# Altium PCB PCB2.PcbDoc
Units mil, origin at the board's own origin, x right, y up, seen from the top; angles counter-clockwise.
Board outline 9260 x 3485 mil, 2 copper layers (Top Layer, Bottom Layer); 17 components, 11 nets, 40 pads, 12 vias.
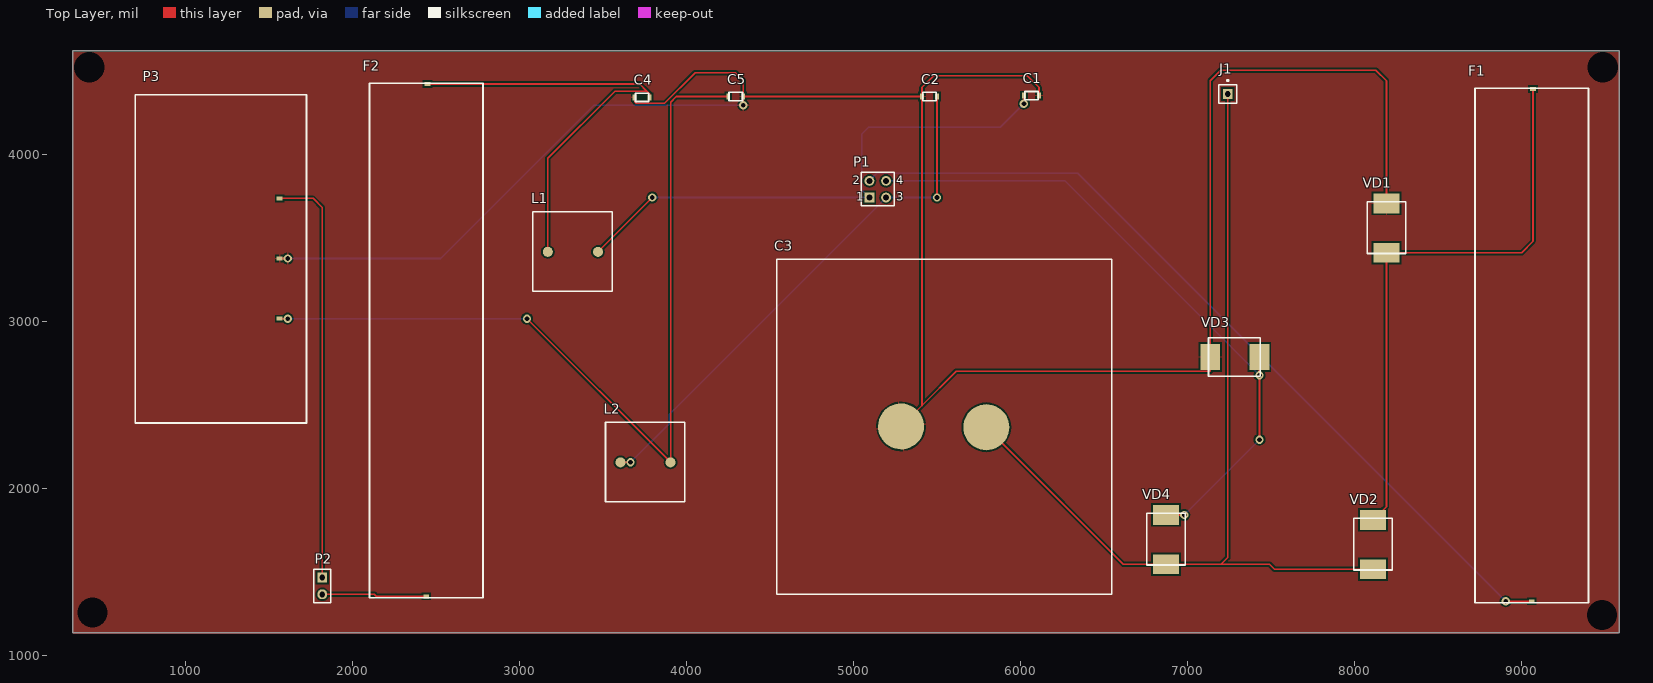
[diagram p0: Top Layer view]
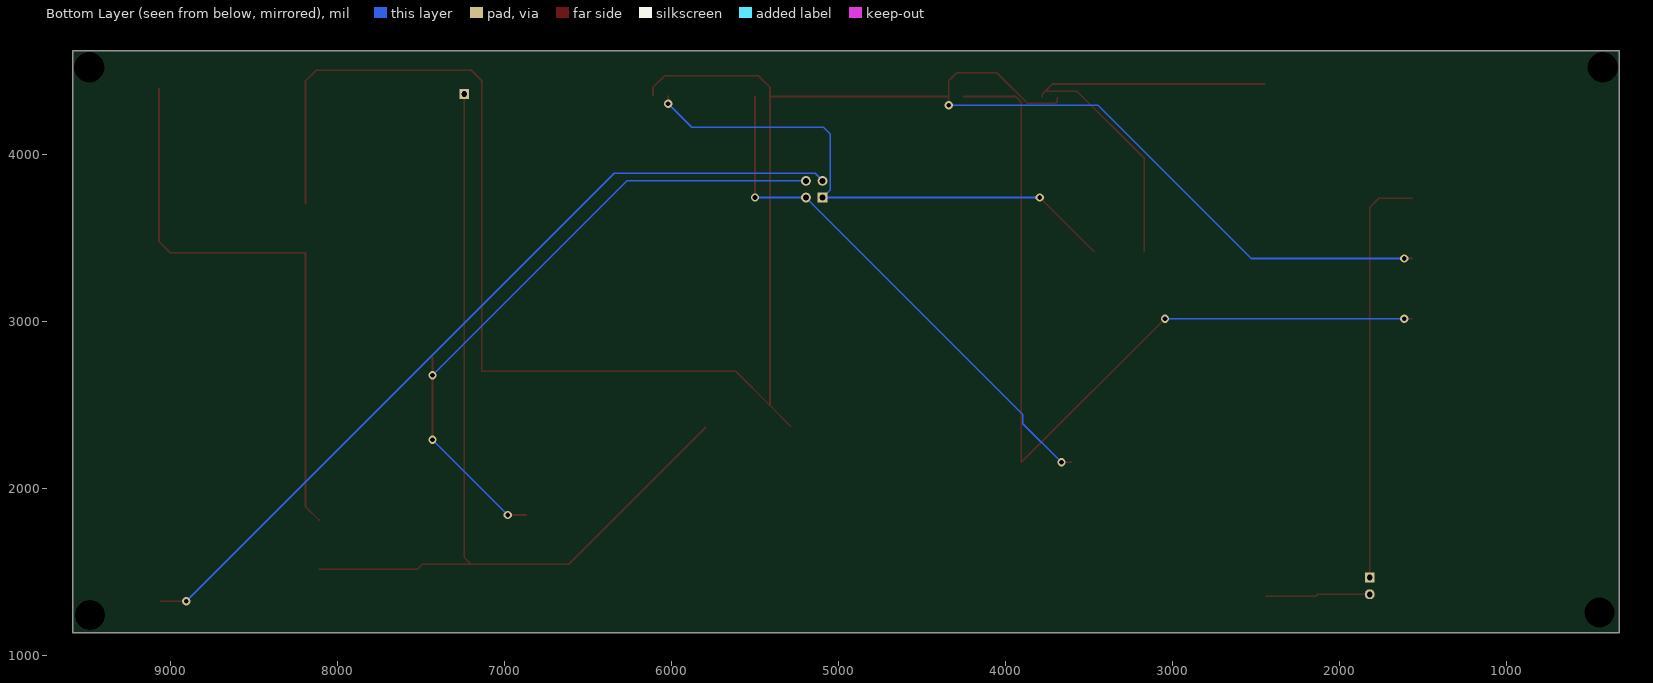
[diagram p1: Bottom Layer view, seen from below]
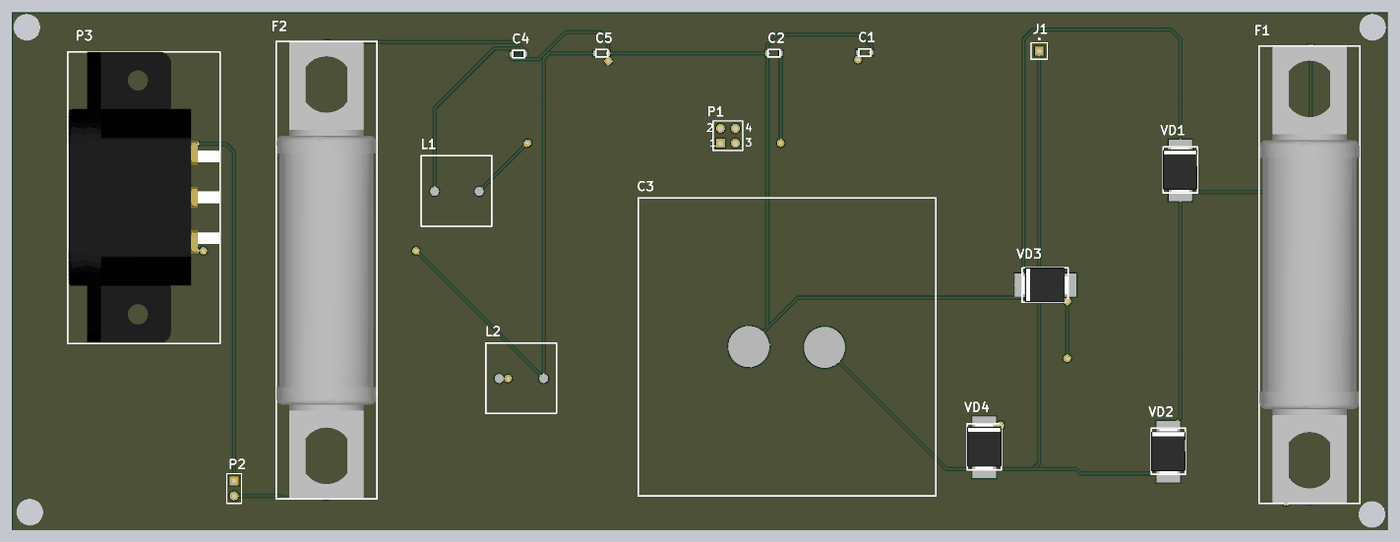
[diagram p2: 3D render of the assembled board from above, using the file's embedded part models]

## Layer stack, top to bottom
Top Solder: solder mask 0.4, Solder Resist, Dk 3.5
Top Layer: signal copper 1.4
Dielectric 1: dielectric 12.6, FR-4, Dk 4.8
Bottom Layer: signal copper 1.4
Bottom Solder: solder mask 0.4, Solder Resist, Dk 3.5

## Board outline
325,1135 9585,1135 9585,4620 325,4620

## Design rules (kind name [scope] priority, off if disabled: settings)
Clearance [All] p1: gap=10 ignorepadtopadclearanceinfootprint=FALSE except(0: Arc-Hole Track-Hole SMDPad-Hole THPad-Hole Via-Hole Fill-Hole Poly-Hole Region-Hole Text-Hole)
PolygonConnect [All] p1: connectstyle=Relief reliefconductorwidth=10 reliefentries=4 polygonreliefangle="90 Angle" airgapwidth=10
RoomDefinition Э3 [InComponentClass('Э3')] p1: confinementstyle=ConfineIn formatcopy=TRUE lockcomponents=FALSE outline 415,1270 9430,1270 9430,4560 415,4560
RoutingVias [All] p1: holewidth=28 width=50 viastyle="Through Hole" minholewidth=28 minwidth=50 maxholewidth=28 maxwidth=50
SolderMaskExpansion [All] p1: expansion=4
Width [All] p1: maxlimit=10 minlimit=10 preferedwidth=10
30 further rules are at their usual default settings.

## Components (designator, comment, footprint, x,y, rotation, side; value= is the part's Value field where it differs from the comment)
C1 "0.1 мкФ" Condensator 6065,4350 r0 top
C2 "0.1 мкФ" Condensator 5455,4345 r0 top
C3 "220000 мкФ" condpolar 5600,2410 r0 top
C4 "0.1 мкФ" Condensator 3735,4340 r0 top
C5 "0.1 мкФ" Condensator 4295,4345 r0 top
F1 "FUSE" "FUSE 80" 9060,2855 r0 top
F2 "FUSE" "FUSE 80" 2442.13,2884.57 r0 top
J1 "Socket" PIN1 7240,4360 r0 top
L1 "inductor" inductor 3315,3420 r0 top
L2 "inductor" inductor 3750,2160 r0 top
P1 "Header 2X2" HDR2X2 5095,3740 r0 top
P2 "Header 2" HDR1X2 1820,1465 r270 top
P3 "Plug AC Male" AC 1060,3280 r90 top
VD1 "Diod" DIOD 8195,3565 r0 top
VD2 "Diod" DIOD 8115,1670 r0 top
VD3 "Diod" DIOD 7275,2790 r90 top
VD4 "Diod" DIOD 6875,1700 r0 top

## Footprints (in the part's own frame and the unit in brackets; to place one, negate y for a bottom-side part, rotate by r counter-clockwise, add the part's x,y. Pads: shape width x height; smd on the part's side, far side on the other; paste and mask are expansions set on the pad)
AC [mil]
  rect 23.62x35.43 smd: 1(455,-505) 2(-265,-505) 3(95,-505)
  silkscreen extent -890,-665 1075,360, body extent -885,-660 1075,356, height 1235
Condensator [mm]
  rect 0.6x0.9 smd: 1(-1.143,0) 2(1.143,0)
  silkscreen extent -1.02,-0.64 1.02,0.64, body extent -0.98,-0.65 1.02,0.65, height 1.27
condpolar [mil]
  round 275.59 smd: 1(-315,-40) 2(195,-45)
  silkscreen extent -1060,-1045 945,960, body extent -1064,-1047 944,957, height 4016
DIOD [mil]
  rect 157.48x118.11 smd: 1(-5,140) 2(-5,-155)
  silkscreen extent -120,-160 110,150, body extent -121,-160 111,153, height 110
"FUSE 80" [mm]
  rect 0.9x0.6 smd: 1(0,-38.9) 2(0.2,39)
  silkscreen extent -8.64,-39.12 8.64,39.12, body extent -8.55,-39 8.55,39, height 18.55
HDR1X2 [mm] "Connector; Header; 2 Position"
  rect 1.5x1.5 hole 0.9: 1(0,0)
  round 1.5 hole 0.9: 2(2.54,0)
  silkscreen extent -1.27,-1.27 3.81,1.27
HDR2X2 [mm] "Connector; Header; 2x2 Position"
  rect 1.5x1.5 hole 0.9: 1(0,0)
  round 1.5 hole 0.9: 2(0,2.54) 3(2.54,0) 4(2.54,2.54)
  silkscreen extent -1.27,-1.27 3.81,3.81
inductor [mil]
  round 60 smd: 1(-145,-5) 2(155,-5)
  silkscreen extent -235,-240 240,235, body extent -231,-241 241,231, height 1003
PIN1 [mm] "Connector; Plug"
  rect 1.5x1.5 hole 0.9: 1(0,0)
  silkscreen extent -1.4,-1.4 1.4,2.17

## Part data
C1 C2 C4 C5: library part конденсатор
C3: library part конденсатор_поляр
P1: "Header, 2-Pin, Dual row", LatestRevisionDate=17-Jul-2002, LatestRevisionNote="Re-released for DXP Platform.", Publisher="Altium Limited"
P2: "Header, 2-Pin", LatestRevisionDate=17-Jul-2002, LatestRevisionNote="Re-released for DXP Platform.", Publisher="Altium Limited"
P3: "IEC Mains Power Inlet, EN60 320-1 C14 Class I Cold Condition, PC Flange Rear Mount, Chassis Plug", MaximumRating="10A, 250V a.c. (UL & CSA 15A, 250V a.c.)", PackageDocument="ver.80, 15-Sep-2003", ComponentLink1Description="Manufacturer Link", ComponentLink1URL=http://www.bulgin.co.uk/, DatasheetDocument="ver.80, 15-Sep-2003", DrillSize="Corresponds to nominal value.", LatestRevisionDate=15-Jul-2004, LatestRevisionNote="Component Replaced.", MountingFixtures="Not drawn on schematic symbol.", Note="IEC Color Scheme employed for L, N and E.", PackageReference=PX0580/PC, PCB_Layout="Complies with manufacturer's recommendation.", Published=15-Jul-2004, Publisher="Altium Limited", Terminations="P.C. Spills"
J1: LatestRevisionDate=17-Jul-2002, LatestRevisionNote="Re-released for DXP Platform.", Publisher="Altium Limited"

## Free pads (board coordinates)
  round 60 hole 180 unplated: 1(425,4520) 2(9485,4520) 3(9480,1240) 4(445,1255)

## Via types
v1: diameter 50, hole 28, Top Layer to Bottom Layer, 12 vias

## Nets (pads, with @x,y where several pads share a name; then routed paths per layer and width w, separated by ;. In a path a pad name is that pad's centre, name@x,y a point inside that pad or via, vN(x,y) a via of type N, cw(c..) or ccw(c..) an arc to the next point about the centre after c; other vN are vias at no path point)
GND: C1.2 C2.1 C3.1 C4.1 C5.2 P3.3 pad.1 pad.2 pad.3 pad.4 VD1.1 VD3.1 | length 13429.5
  Top Layer w10: P3.3 v1(1613,3375) ; C4.1 3690,4314 3700,4304 3869,4304 4052,4487 4293,4487 4340,4440 C5.2 ; v1(4340,4293) C5.2 ; C3.1 5410,2495 ; C1.2 6110,4400 6040,4470 5480,4470 5410,4400 C2.1 ; VD1.1 8190,4440 8127,4503 7198,4503 7135,4440 VD3.1 7135,2700 5615,2700 5410,2495 ; C5.2 C2.1 ; 5410,2495 C2.1
  Bottom Layer w10: v1(1613,3375) 2529,3375 3447,4293 v1(4340,4293)
NetC1_1: C1.1 L1.2 P1.1 | length 3251.6
  Top Layer w10: L1.2 v1(3795,3740) ; v1(6020,4302) C1.1
  Bottom Layer w10: v1(3795,3740) P1.1 5050,3785 5050,4120 5090,4160 5878,4160 v1(6020,4302)
NetC2_2: C2.2 L2.1 P1.3 | length 3188.7
  Top Layer w10: L2.1 v1(3665,2155) ; v1(5500,3740) C2.2
  Bottom Layer w10: v1(3665,2155) 3896,2386 3896,2441 P1.3 v1(5500,3740)
NetC3_2: C3.2 J1.1 VD2.2 VD4.2 | length 5498.7
  Top Layer w10: C3.2 6615,1545 VD4.2 7200,1545 ; J1.1 7240,1585 7200,1545 ; VD2.2 7520,1515 7490,1545 7200,1545
NetC4_2: C4.2 F2.2 L1.1 | length 2694.4
  Top Layer w10: F2.2 3720,4420 3763,4377 ; L1.1 3170,3975 3572,4377 3763,4377 ; C4.2 3780,4360 3763,4377
NetC5_1: C5.1 L2.2 P3.2 | length 5211.3
  Top Layer w10: P3.2 v1(1613,3015) ; v1(3045,3015) L2.2 3905,4311 3939,4345 C5.1
  Bottom Layer w10: v1(1613,3015) v1(3045,3015)
NetF1_1: F1.1 P1.2 | length 5044.3
  Top Layer w10: v1(8903.5,1323.5) F1.1
  Bottom Layer w10: P1.2 5139.53,3884.53 6342.47,3884.53 v1(8903.5,1323.5)
NetF1_2: F1.2 VD1.2 VD2.1 | length 3451.7
  Top Layer w10: VD2.1 8190,1890 VD1.2 9000,3410 9067.87,3477.87 F1.2
NetF2_1: F2.1 P2.2 | length 627.1
  Top Layer w10: P2.2 2131,1365 2142.93,1353.07 F2.1
NetP1_4: P1.4 VD3.2 VD4.1 | length 3957.8
  Top Layer w10: VD4.1 v1(6979,1840) ; v1(7430,2291) v1(7430,2676.26) VD3.2
  Bottom Layer w10: P1.4 6266.26,3840 v1(7430,2676.26) ; v1(6979,1840) v1(7430,2291)
NetP2_1: P2.1 P3.1 | length 2492.8
  Top Layer w10: P3.1 1765,3735 1820,3680 P2.1

## Polygon pours and split planes (outlines as drawn)
GND on Top Layer "Top Layer-No Net" (solid, pour order 0): 330,4610 9580,4610 9580,1135 9575,1130 330,1130

## Text inside footprints (layer, text, board x,y; h text height)
P1: Top Overlay "1" at 5015,3720 h50; Top Overlay "2" at 4995,3820 h50; Top Overlay "4" at 5255,3820 h50; Top Overlay "3" at 5255,3720 h50